# Allegro board demob22222222.brd
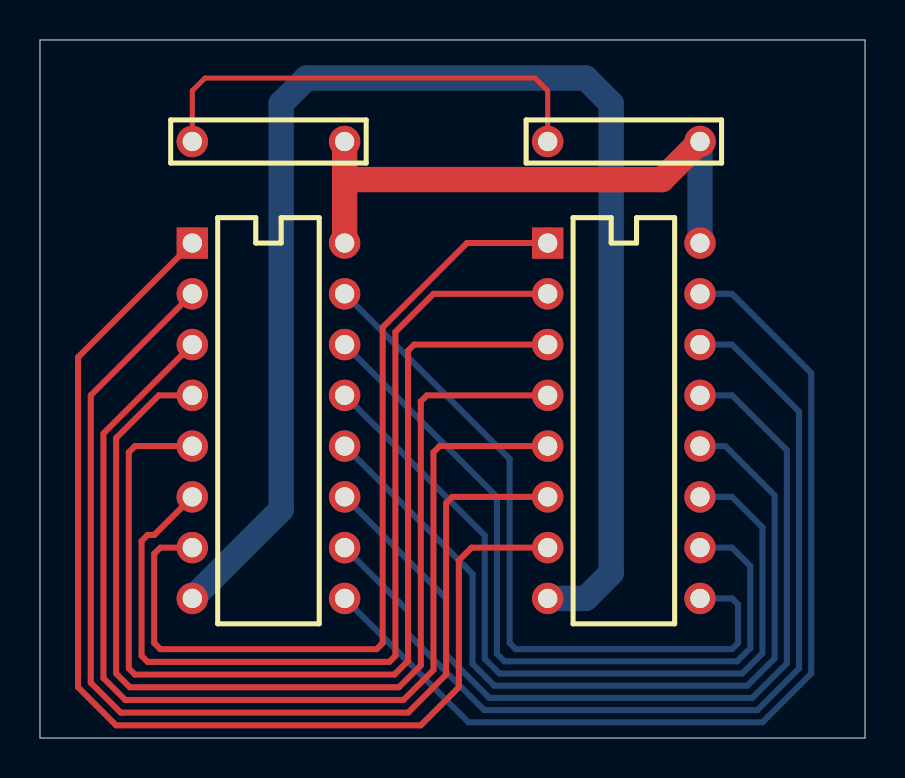
[diagram p0: board, top side]
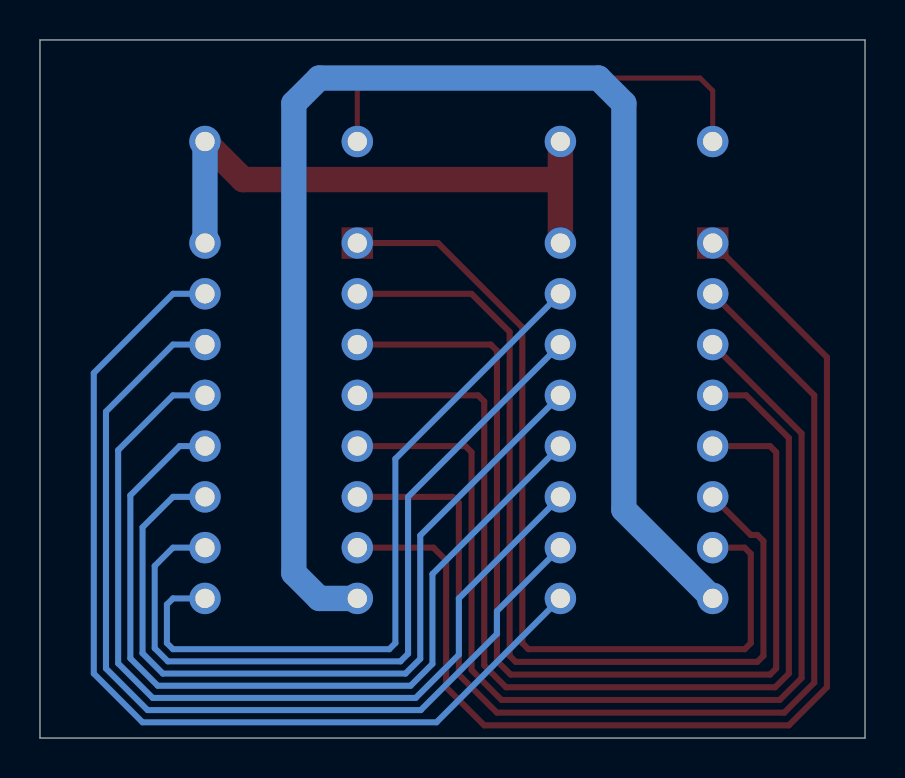
[diagram p1: board, bottom side, seen from below]

Outline 41.27 x 34.93 mm; copper layers: TOP, GND, POWER, INNER1, INNER2, BOTTOM. Coordinates in mm from the lower left corner of the outline.
Outline path: 0,34.93 41.27,34.93 41.27,0 0,0 0,34.93

## Design rules (mm)
nets with their own width: min track width 0.254; nets GND_SIGNAL
nets with their own width: min track width 0.305; nets N01899 N01900 N01901 N01902 N01903 N01904 N01905 N01906 N01907 N01908 N01909 N01910 N01911 N01912
nets with their own width: min track width 1.27; nets GND VCC

## Placement (name value [footprint] x y rotation side)
C1  CAP NP  [AC300100A]  15.24 29.85 180 top
C2  CAP NP  [AC300100A]  33.02 29.85 180 top
U1  74LS158  [DIP16]  7.62 24.77 270 top
U2  74LS158  [DIP16]  25.4 24.77 270 top

## Library data of the parts
C1 C2 = CAP_NP
U1 U2 = 74LS158

## Footprints (pads in the part's own frame, mm; a bottom-side part is the same pattern mirrored in y, then rotated)
AC300100A
  round 1.575 hole 0.965: 1(0,0) 2(7.62,0)
DIP16
  rect 1.575x1.575 hole 0.965: 1(0,0)
  round 1.575 hole 0.965: 2(2.54,0) 3(5.08,0) 4(7.62,0) 5(10.16,0) 6(12.7,0) 7(15.24,0) 8(17.78,0) 9(17.78,7.62) 10(15.24,7.62) 11(12.7,7.62) 12(10.16,7.62) 13(7.62,7.62) 14(5.08,7.62) 15(2.54,7.62) 16(0,7.62)

## Nets
GND: U1.8(TP-8) U2.8(TP-8)
GND_SIGNAL: C1.2(TP-2) C2.2(TP-2)
VCC: C1.1(TP-1) C2.1(TP-1) U1.16(TP-16) U2.16(TP-16)
N01899: U1.2(TP-2) U2.6(TP-6)
N01900: U1.3(TP-3) U2.5(TP-5)
N01901: U1.4(TP-4) U2.4(TP-4)
N01902: U1.5(TP-5) U2.3(TP-3)
N01903: U1.6(TP-6) U2.2(TP-2)
N01904: U1.7(TP-7) U2.1(TP-1)
N01905: U1.9(TP-9) U2.15(TP-15)
N01906: U1.10(TP-10) U2.14(TP-14)
N01907: U1.11(TP-11) U2.13(TP-13)
N01908: U1.12(TP-12) U2.12(TP-12)
N01909: U1.14(TP-14) U2.10(TP-10)
N01910: U1.1(TP-1) U2.7(TP-7)
N01911: U1.13(TP-13) U2.11(TP-11)
N01912: U1.15(TP-15) U2.9(TP-9)

## Routing (per net, layer and track width the routed paths; a pad name or vN(x,y) marks a point on that pad's centre or on a via; arc(x,y) is an arc through that point)
GND: length 71.4
  BOTTOM w1.27: U2.8 27.3,6.99 28.57,8.25 28.57,31.75 27.3,33.02 13.34,33.02 12.06,31.75 12.06,11.43 U1.8
GND_SIGNAL: length 23.4
  TOP w0.254: C2.2 25.4,32.39 24.77,33.02 8.26,33.02 7.62,32.39 C1.2
VCC: length 28.7
  TOP w1.27: C2.1 31.11,27.94 15.24,27.94 ; 15.24,27.94 U1.16 ; 15.24,27.94 C1.1
  BOTTOM w1.27: C2.1 U2.16
N01899: length 54.5
  TOP w0.305: U2.6 20.62,12.07 20.32,11.76 20.32,3.17 18.41,1.27 4.04,1.27 2.54,2.77 2.54,17.14 U1.2
N01900: length 52.8
  TOP w0.305: U2.5 19.99,14.61 19.68,14.3 19.68,3.4 18.19,1.91 4.27,1.91 3.17,3 3.17,15.24 U1.3
N01901: length 52.1
  TOP w0.305: U2.4 19.35,17.14 19.05,16.84 19.05,3.63 17.96,2.54 4.5,2.54 3.81,3.23 3.81,15.01 5.94,17.14 U1.4
N01902: length 51.1
  TOP w0.305: U1.5 4.75,14.61 4.45,14.3 4.45,3.48 4.75,3.17 17.73,3.17 18.41,3.86 18.41,19.38 18.72,19.68 U2.3
N01903: length 46.8
  TOP w0.305: U2.2 19.68,22.22 17.78,20.32 17.78,4.11 17.48,3.81 5.38,3.81 5.08,4.11 5.08,9.86 5.38,10.16 5.71,10.16 U1.6
N01904: length 44
  TOP w0.305: U2.1 21.36,24.77 17.14,20.55 17.14,4.75 16.84,4.45 6.02,4.45 5.71,4.75 5.71,9.22 6.02,9.52 U1.7
N01905: length 49.2
  BOTTOM w0.305: U1.9 21.44,0.79 36.14,0.79 38.58,3.23 38.58,18.26 34.62,22.22 U2.15
N01906: length 46.8
  BOTTOM w0.305: U1.10 18.41,6.35 18.41,5.21 22.23,1.4 35.89,1.4 37.97,3.48 37.97,16.33 34.62,19.68 U2.14
N01907: length 44.8
  BOTTOM w0.305: U2.13 34.62,17.14 37.36,14.4 37.36,3.73 35.64,2.01 22.48,2.01 20.32,4.17 20.32,6.99 U1.11
N01908: length 42.6
  BOTTOM w0.305: U1.12 21.64,8.2 21.64,3.71 22.73,2.62 35.38,2.62 36.75,3.99 36.75,12.14 34.29,14.61 U2.12
N01909: length 38.7
  BOTTOM w0.305: U1.14 22.86,12.07 22.86,4.22 23.24,3.84 34.87,3.84 35.53,4.5 35.53,8.61 34.62,9.52 U2.10
N01910: length 56.3
  TOP w0.305: U1.1 1.91,19.05 1.91,2.54 3.81,0.64 19.05,0.64 20.95,2.54 20.95,8.89 21.59,9.52 U2.7
N01911: length 40.8
  BOTTOM w0.305: U2.11 34.62,12.07 36.14,10.54 36.14,4.24 35.13,3.23 22.99,3.23 22.25,3.96 22.25,10.13 U1.13
N01912: length 36.5
  BOTTOM w0.305: U2.9 34.62,6.99 34.92,6.68 34.92,4.75 34.62,4.45 23.8,4.45 23.5,4.75 23.5,13.97 U1.15
